# Altium PCB PCB_2021-01-17_17-44-20_2021-03-21.pcbdoc
Units mil, origin at the board's own origin, x right, y up, seen from the top; angles counter-clockwise.
Board outline 2887.8 x 2040 mil, 2 copper layers (Top Layer, Bottom Layer); 7 components, 9 nets, 23 pads, 9 vias.
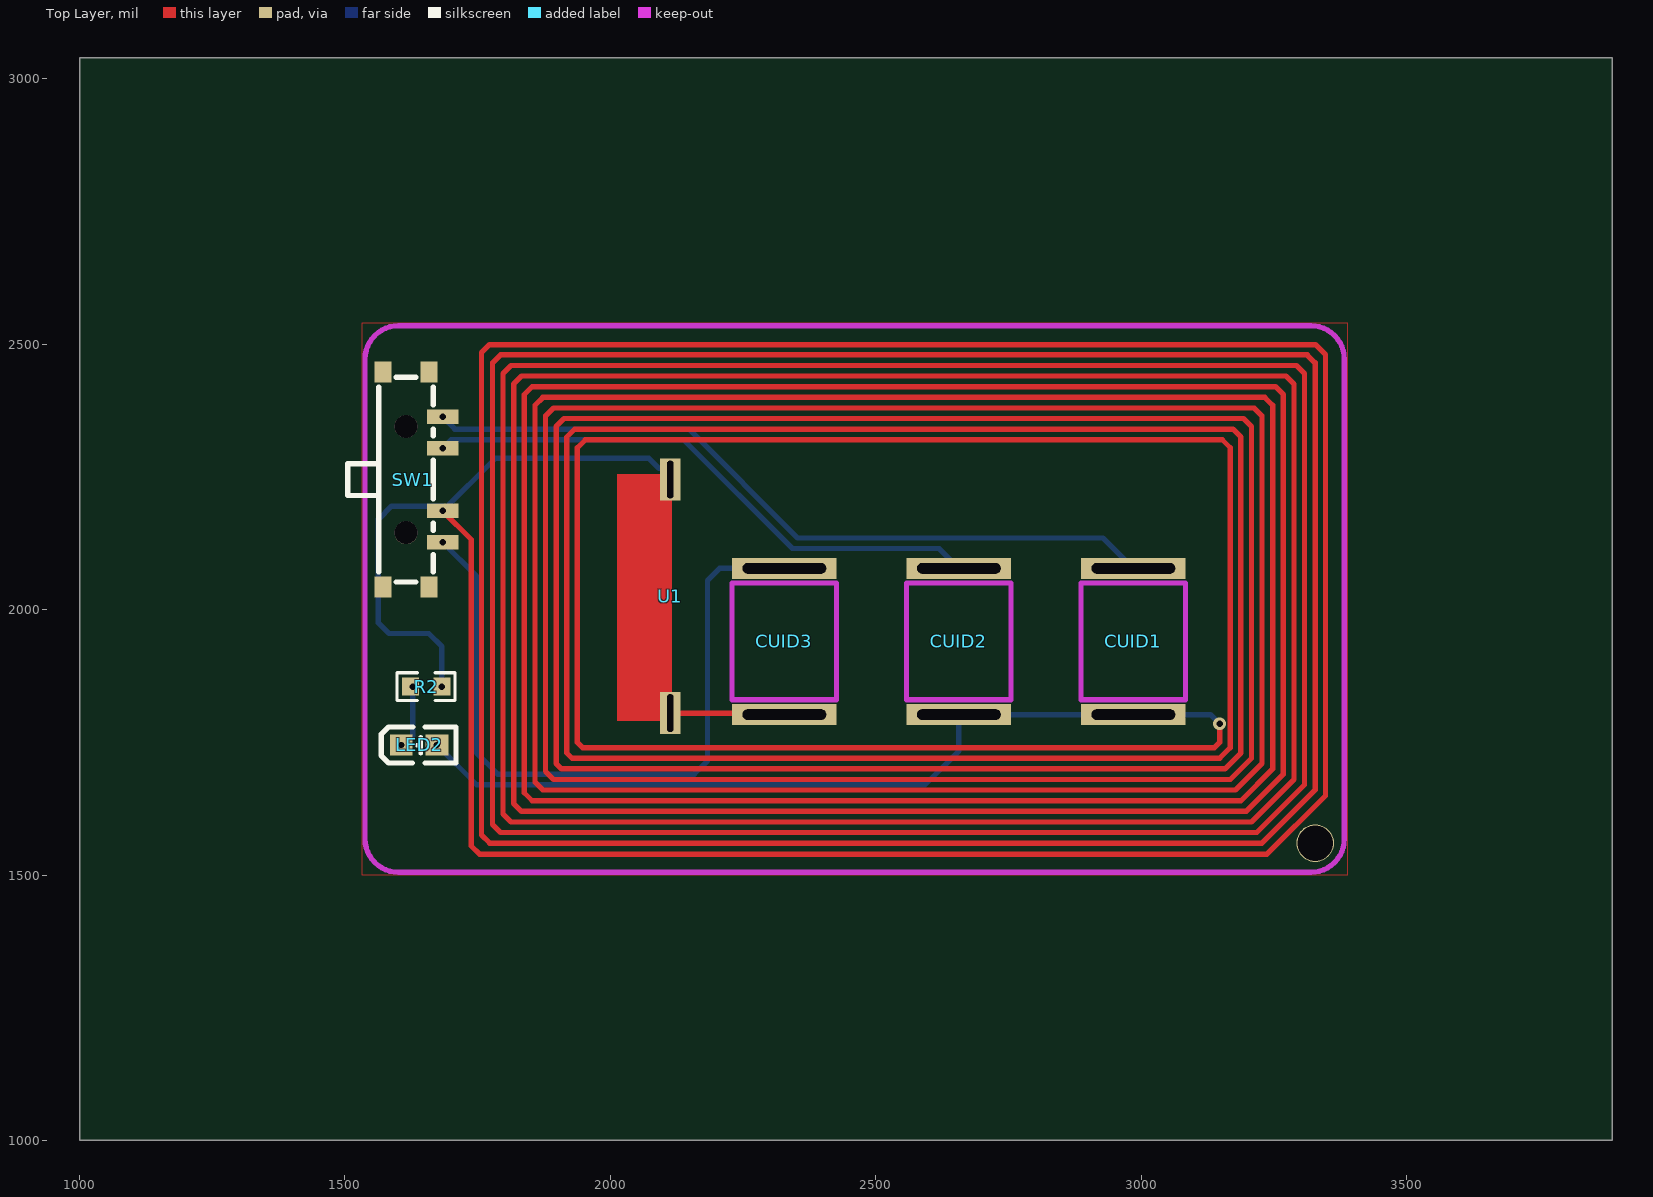
[diagram p0: Top Layer view]
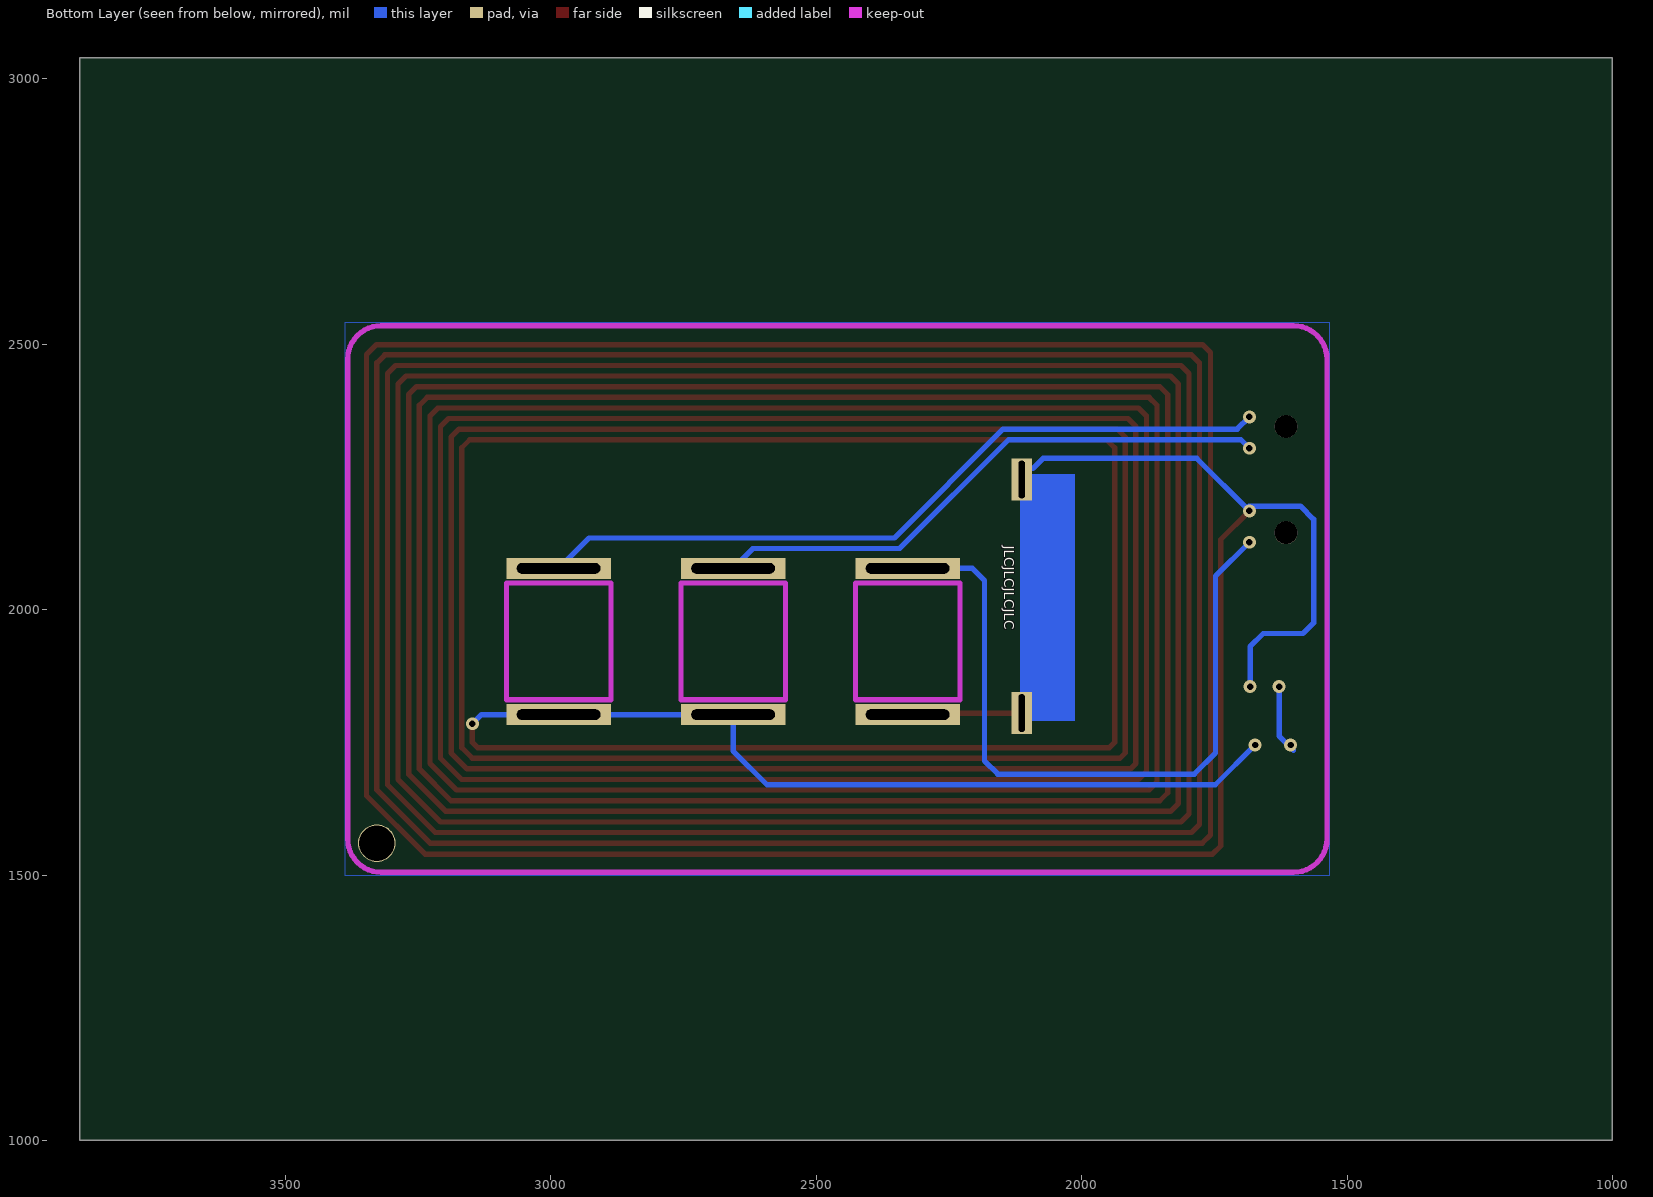
[diagram p1: Bottom Layer view, seen from below]

## Layer stack, top to bottom
Top Layer: signal copper (thickness not stored)
Dielectric: dielectric 12.6, FR-4, Dk 4.8
Bottom Layer: signal copper (thickness not stored)

## Board outline
3887.8,1000 1000,1000 1000,3040 3887.8,3040

## Components (designator, comment, footprint, x,y, rotation, side; value= is the part's Value field where it differs from the comment)
CUID1 "CUID" CUID卡槽 2985.3,1940 r180 top
CUID2 "CUID" CUID卡槽 2656.52,1940 r180 top
CUID3 "CUID" CUID卡槽 2327.75,1940 r180 top
LED2 "0603YYellow light 90-110" LED0603-R-RD 1639.63,1745 r0 top
R2 "1K" R0603 1652.8,1855 r0 top
SW1 "SSSS812201" SW-SMD_SSSS812201 1627.8,2245 r270 top
U1 "ID 125K 天线" "125KHZ RFID" 2012.8,2255 r0 top

## Footprints (in the part's own frame and the unit in brackets; to place one, negate y for a bottom-side part, rotate by r counter-clockwise, add the part's x,y. Pads: shape width x height; smd on the part's side, far side on the other; paste and mask are expansions set on the pad)
"125KHZ RFID" [mm]
  rect 1x2 hole 0.305 slot 1.8 at 90 deg: ID1(2.54,-0.254) ID2(2.54,-11.43)
  Multi-Layer region: 0,0 2.6,0 2.6,-11.8 0,-11.8
CUID卡槽 [mm]
  rect 5x1 hole 0.5 slot 4 at 0 deg: 1(0,3.5) 2(0,-3.5)
  Keep-Out Layer lines w0.254: 2.502,2.794 2.502,-2.794 -2.499,-2.794 -2.499,2.794 2.502,2.794
LED0603-R-RD [mil]
  rect 43x39 smd: 1(33.5,0) 2(-33.5,0)
  silkscreen extent -72,-34 70,34
R0603 [mil]
  rect 31.75x34.02 smd: 1(-29.65,0) 2(29.65,0)
  silkscreen extent -55,-26 55,26
SW-SMD_SSSS812201 [mm]
  rect 0.7x1.5 smd: 1(-3,1.425) 2(-1.5,1.425) 3(1.5,1.425) 4(3,1.425)
  rect 1x0.8 smd: 5(-5.15,0.775) 6(-5.15,-1.425) 7(5.15,-1.425) 8(5.15,0.775)
  round 1.1 hole 1.1 unplated: ""(-2.54,-0.325) ""(2.54,-0.325)
  silkscreen extent -4.9,-3.12 4.9,0.98

## Free pads (board coordinates)
  round 70.87 hole 66.93: 1(3327.8,1560)

## Via types
v1: diameter 24.41, hole 12.01, Top Layer to Bottom Layer, 6 vias
v2: diameter 24.41, hole 12, Top Layer to Bottom Layer, 3 vias

## Nets (pads, with @x,y where several pads share a name; then routed paths per layer and width w, separated by ;. In a path a pad name is that pad's centre, name@x,y a point inside that pad or via, vN(x,y) a via of type N, cw(c..) or ccw(c..) an arc to the next point about the centre after c; other vN are vias at no path point)
1: CUID1.2 SW1.1 | length 1419.6
  Bottom Layer w10: v2(1683.89,2363.11) 1706.99,2340 2147.8,2340 2352.8,2135 2928.09,2135 CUID1.2
2: CUID2.2 SW1.2 | length 1079.5
  Bottom Layer w10: v2(1683.89,2304.06) 1699.8,2320 2137.8,2320 2342.8,2115 2619.3,2115 CUID2.2
B: CUID1.1 CUID2.1 LED2.1 R2.2 SW1.3 U1.ID1 | length 47683.7
  Top Layer w10: SW1.3 1737.8,2132.1 1737.8,1555 1753.49,1539.3 3237.09,1539.3 3347.2,1649.4 3347.2,2480.6 3328.49,2499.3 1772.1,2499.3 1757.19,2484.4 1757.19,1575.6 1772.8,1560 3227.8,1560 3327.8,1660 3327.8,2465 3312.8,2480 1792.8,2480 1777.8,2465 1777.8,1595 1792.8,1580 3217.8,1580 3307.8,1670 3307.8,2445 3292.8,2460 1812.8,2460 1797.8,2445 1797.8,1615 1812.8,1600 3207.8,1600 3287.8,1680 3287.8,2425 3272.8,2440 1832.8,2440 1817.8,2425 1817.8,1635 1832.8,1620 3197.8,1620 3267.8,1690 3267.8,2405 3252.8,2420 1852.8,2420 1837.8,2405 1837.8,1655 1852.8,1640 3187.8,1640 3247.8,1700 3247.8,2385 3232.8,2400 1872.8,2400 1857.8,2385 1857.8,1675 1872.8,1660 3177.8,1660 3227.8,1710 3227.8,2365 3212.8,2380 1892.8,2380 1877.8,2365 1877.8,1695 1892.8,1680 3167.8,1680 3207.8,1720 3207.8,2345 3192.8,2360 1912.8,2360 1897.8,2345 1897.8,1710 1907.8,1700 3157.8,1700 3187.8,1730 3187.8,2325 3172.8,2340 1932.8,2340 1917.8,2325 1917.8,1730 1927.8,1720 3147.8,1720 3167.8,1740 3167.8,2305 3152.8,2320 1952.8,2320 1937.8,2305 1937.8,1750 1947.8,1740 3137.8,1740 3147.8,1750 v2(3147.8,1785)
  Bottom Layer w10: v1(1673.13,1745) 1748.13,1670 2592.8,1670 2656.53,1733.73 CUID2.1 CUID1.1 3130.59,1802.2 v2(3147.8,1785) ; v1(1682.45,1855) 1682.49,1930.3 1657.8,1955 1582.8,1955 1562.8,1975 1562.8,2170 1587.8,2195 1683.89,2195 1683.89,2185.9 1782.99,2285 2072.8,2285 2091.8,2266
  other v1: 1683.89,2185.95
GND: 
ID1: CUID3.2 SW1.4 | length 1379.7
  Bottom Layer w10: v1(1683.89,2126.89) 1747.8,2062.99 1747.8,1730 1787.8,1690 2157.8,1690 2182.8,1715 2182.8,2055 2205.59,2077.79 CUID3.2
ID2: CUID3.1 U1.ID2 | length 202.7
  Top Layer w10: U1.ID2@2126.24,1805 2324.95,1805 CUID3.1
LED2_2: LED2.2 R2.1 | length 131.2
  Bottom Layer w10: v1@1600.8,1735 1627.8,1762 v1(1627.8,1855)
  other v1: 1606.13,1745
S$63: 
S$65: 
pads on no net: SW1. SW1.5 SW1.6 SW1.7 SW1.8

## Polygon pours and split planes (outlines as drawn)
GND on Bottom Layer (solid): 1532.8,2540 3387.8,2540 3387.8,1500 1532.8,1500 1532.8,2540
GND on Top Layer (solid): 1532.8,2540 3387.8,2540 3387.8,1500 1532.8,1500 1532.8,2540

## Keep-outs
Keep-Out Layer:
  lines w10: 1537.8,1567.99 ccw(c1600.79,1567.99) 1600.79,1505 ; 1537.8,2472.01 cw(c1600.79,2472.01) 1600.79,2535 ; 3319.8,1505 ccw(c3319.8,1567.99) 3382.8,1567.99 ; 3319.8,2535 cw(c3319.8,2472.01) 3382.8,2472.01

## Silkscreen, mask and mechanical layers (free items; w line width, h text height)
Bottom Overlay:
  text "JLCJLCJLCJLC" at 2152.8,2120 h31.5 r90
Document:
  lines w0.1: 2442.9,2019 2444.9,2021